# EAGLE board PIC16F876A (EAGLE 9.1.3)

Size 160 x 100 mm. Coordinates in mm from the lower left corner, seen from the top.
Outline: 0,0 160,0 160,100 0,100 0,0
Copper layers (1*16): Top 0.035mm / dielectric 1.5mm / Bottom 0.035mm
Design rules "default": minimum track width 6mil, minimum drill 0.35mm, track to track 6mil, track to pad 6mil, pad to pad 6mil, via to via 6mil, smd to smd 6mil, copper to edge 40mil, drill to drill 6mil, minimum pad ring 10mil, minimum via ring 8mil, stop-mask expansion 4mil, vias tented up to drill 0mil, thermal gap 10mil

## Footprints (pad centres in the part's own frame; a part is rotated, then mirrored left to right if it is on the bottom)
CAPC2012X140N = smd 1.15 x 1.45: 1 -0.9,0; 2 0.9,0
0603 = smd 1.1 x 1: 1 -0.85,0; 2 0.85,0
QS = drill 0.61 long: 1 -2.54,0; 2 2.54,0
0805-ARV = smd 0.65 x 1: 1 -1.905,-1; 2 -0.635,-1; 3 0.635,-1; 4 1.905,-1; 5 1.905,1; 6 0.635,1; 7 -0.635,1; 8 -1.905,1
DIP04YL = drill 0.813 long: 1 -3.81,-3.81; 2 -1.27,-3.81; 3 1.27,-3.81; 4 3.81,-3.81; 5 3.81,3.81; 6 1.27,3.81; 7 -1.27,3.81; 8 -3.81,3.81
XCVR_RN42-I/RM = smd 1.5 x 0.8: 1 0.25,16; 2 0.25,14.8; 3 0.25,13.6; 4 0.25,12.4; 5 0.25,11.2; 6 0.25,10; 7 0.25,8.8; 8 0.25,7.6; 9 0.25,6.4; 10 0.25,5.2; 11 0.25,4; 12 0.25,2.8; 13 12.95,2.8; 14 12.95,4; 15 12.95,5.2; 16 12.95,6.4; 17 12.95,7.6; 18 12.95,8.8; 19 12.95,10; 20 12.95,11.2; 21 12.95,12.4; 22 12.95,13.6; 23 12.95,14.8; 24 12.95,16 | smd 0.8 x 1.5: 28 9.7,0.25; 29 3.5,0.25; 30 10.8,0.25; 31 8.4,0.25; 32 7.2,0.25; 33 6,0.25; 34 4.8,0.25; 35 2.5,0.25 | smd 1.3 x 0.8 rotated 135: S1 0.8,0.8; S3 12.4,19.3 | smd 1.3 x 0.8 rotated 45: S2 12.4,0.7; S4 0.8,19.3
SOP254P785X200-28N = smd 1.651 x 0.432: 1 -3.581,4.216; 2 -3.581,3.581; 3 -3.581,2.921; 4 -3.581,2.286; 5 -3.581,1.626; 6 -3.581,0.965; 7 -3.581,0.33; 8 -3.581,-0.33; 9 -3.581,-0.965; 10 -3.581,-1.626; 11 -3.581,-2.286; 12 -3.581,-2.921; 13 -3.581,-3.581; 14 -3.581,-4.216; 15 3.581,-4.216; 16 3.581,-3.581; 17 3.581,-2.921; 18 3.581,-2.286; 19 3.581,-1.626; 20 3.581,-0.965; 21 3.581,-0.33; 22 3.581,0.33; 23 3.581,0.965; 24 3.581,1.626; 25 3.581,2.286; 26 3.581,2.921; 27 3.581,3.581; 28 3.581,4.216
S3B-XH-A(LF)(SN) = drill 1: 1 0,2.5; 2 0,0; 3 0,-2.5

## Placement (x,y rotation side)
C1  08052U220JAT2A  [CAPC2012X140N]  -39.37,54.61 0 top  (outside the outline)
C2  08052U220JAT2A  [CAPC2012X140N]  -55.88,54.61 0 top  (outside the outline)
LED_BLUE  LTST-C190TBKT  [0603]  -41.91,60.96 0 top  (outside the outline)
LED_GREEN  LTST-C190KGKT  [0603]  -26.67,60.96 0 top  (outside the outline)
Q1  [QS]  -19.05,53.34 0 top  (outside the outline)
R1  220  [0603]  -53.34,59.69 0 top  (outside the outline)
R2  220  [0603]  -15.24,66.04 0 top  (outside the outline)
RN1  1k  [0805-ARV]  -46.99,59.69 0 top  (outside the outline)
S1  [DIP04YL]  -40.64,40.64 0 top  (outside the outline)
U1  RN41-I/RM  [XCVR_RN42-I/RM]  -27.94,5.08 0 top  (outside the outline)
U$1  PIC16LF876A-I/SS  [SOP254P785X200-28N]  -50.8,8.89 0 top  (outside the outline)
X1  S3B-XH-A(LF)(SN)  [S3B-XH-A(LF)(SN)]  -24.13,43.18 0 top  (outside the outline)

## Library data of the parts
C1 C2 = 08052U220JAT2A; AVAILABILITY: Unavailable; DESCRIPTION: Cap Ceramic 22pF 200V C0G 5% SMD 0805 125°C T/R; MF: AVX; MP: 08052U220JAT2A; PACKAGE: 0805 AVX; PRICE: None
LED_BLUE = LTST-C190TBKT; AVAILABILITY: Unavailable; DESCRIPTION: Blue 1.6 x 0.8 x 0.8 mm 130° Water Clear 112 mcd 3.8 V SMT LED; MF: Lite-On Inc.; MP: LTST-C190TBKT; PACKAGE: 0603 Lite-On; PRICE: None
LED_GREEN = LTST-C190KGKT; AVAILABILITY: Unavailable; DESCRIPTION: Green 1.6 x 0.8 x 0.8 mm 130° Water Clear 35 mcd 2 V LED SMT; MF: Lite-On Inc.; MP: LTST-C190KGKT; PACKAGE: 0603 Lite-On; PRICE: None
Q1 = special
R1 R2 = SparkFun-Resistors; PROD_ID: RES-07861
RN1 = SparkFun-Resistors; PROD_ID: RES-13020
S1 = switch-dil; OC_FARNELL: unknown; OC_NEWARK: unknown
U1 = RN41-I_RM; AVAILABILITY: Unavailable; DESCRIPTION: RN-41 Series 100 Meter Range 3 Mbps Class 1 Bluetooth Module; MF: Microchip; MP: RN41-I/RM; PACKAGE: SMD-35 Microchip; PRICE: None
U$1 = PIC16LF876A-I_SS; AVAILABILITY: Unavailable; DESCRIPTION: PIC16 Series 368 B RAM 14 kB Flash 8-Bit Enhanced Microcontroller - SSOP-28; MF: Microchip; MP: PIC16LF876A-I/SS; PACKAGE: SSOP-28 Microchip; PRICE: None
X1 = S3B-XH-A_LF__SN_; AVAILABILITY: Unavailable; DESCRIPTION: XH Series 3 Position 2.5 mm Pitch Through Hole Side Entry Shrouded Header; MF: JST Sales; MP: S3B-XH-A_LF__SN_; PACKAGE: FakePackage u; PRICE: None

## Nets
GND: C1.2 C2.2 R2.1 U1.1 U1.12 U1.28 U1.29 U$1.8 U$1.19
N$1: LED_GREEN.1 R1.2
N$2: LED_BLUE.1 R2.2
N$3: S1.4
N$4: S1.3
N$5: S1.2
N$6: S1.1
N$7: RN1.2 S1.5
N$8: RN1.3 S1.6
N$9: RN1.4 S1.7
N$10: RN1.1 S1.8
OSC1: C2.1 Q1.1 U$1.9
OSC2: C1.1 Q1.2 U$1.10
PI02: LED_BLUE.2 U1.19
PI05: R1.1 U1.21
SHIELD: U1.S1 U1.S2 U1.S3 U1.S4
VDD: LED_GREEN.2 U1.11 U$1.20

## Tracks (layer width: path | path; a pad name or v marks a point on that pad's centre or on a via)
GND  (8 unrouted)
N$1  (1 unrouted)
N$2  (1 unrouted)
N$7  (1 unrouted)
N$8  (1 unrouted)
N$9  (1 unrouted)
N$10  (1 unrouted)
OSC1  (2 unrouted)
OSC2  (2 unrouted)
PI02  (1 unrouted)
PI05  (1 unrouted)
SHIELD  (3 unrouted)
VDD  (2 unrouted)